# Altium PCB PCB.PcbDoc
Units mm, origin at the board's own origin, x right, y up, seen from the top; angles counter-clockwise.
Board outline 152.4 x 101.6 mm, 2 copper layers (Top Layer, Bottom Layer); 31 components, 28 nets, 112 pads, 13 vias.
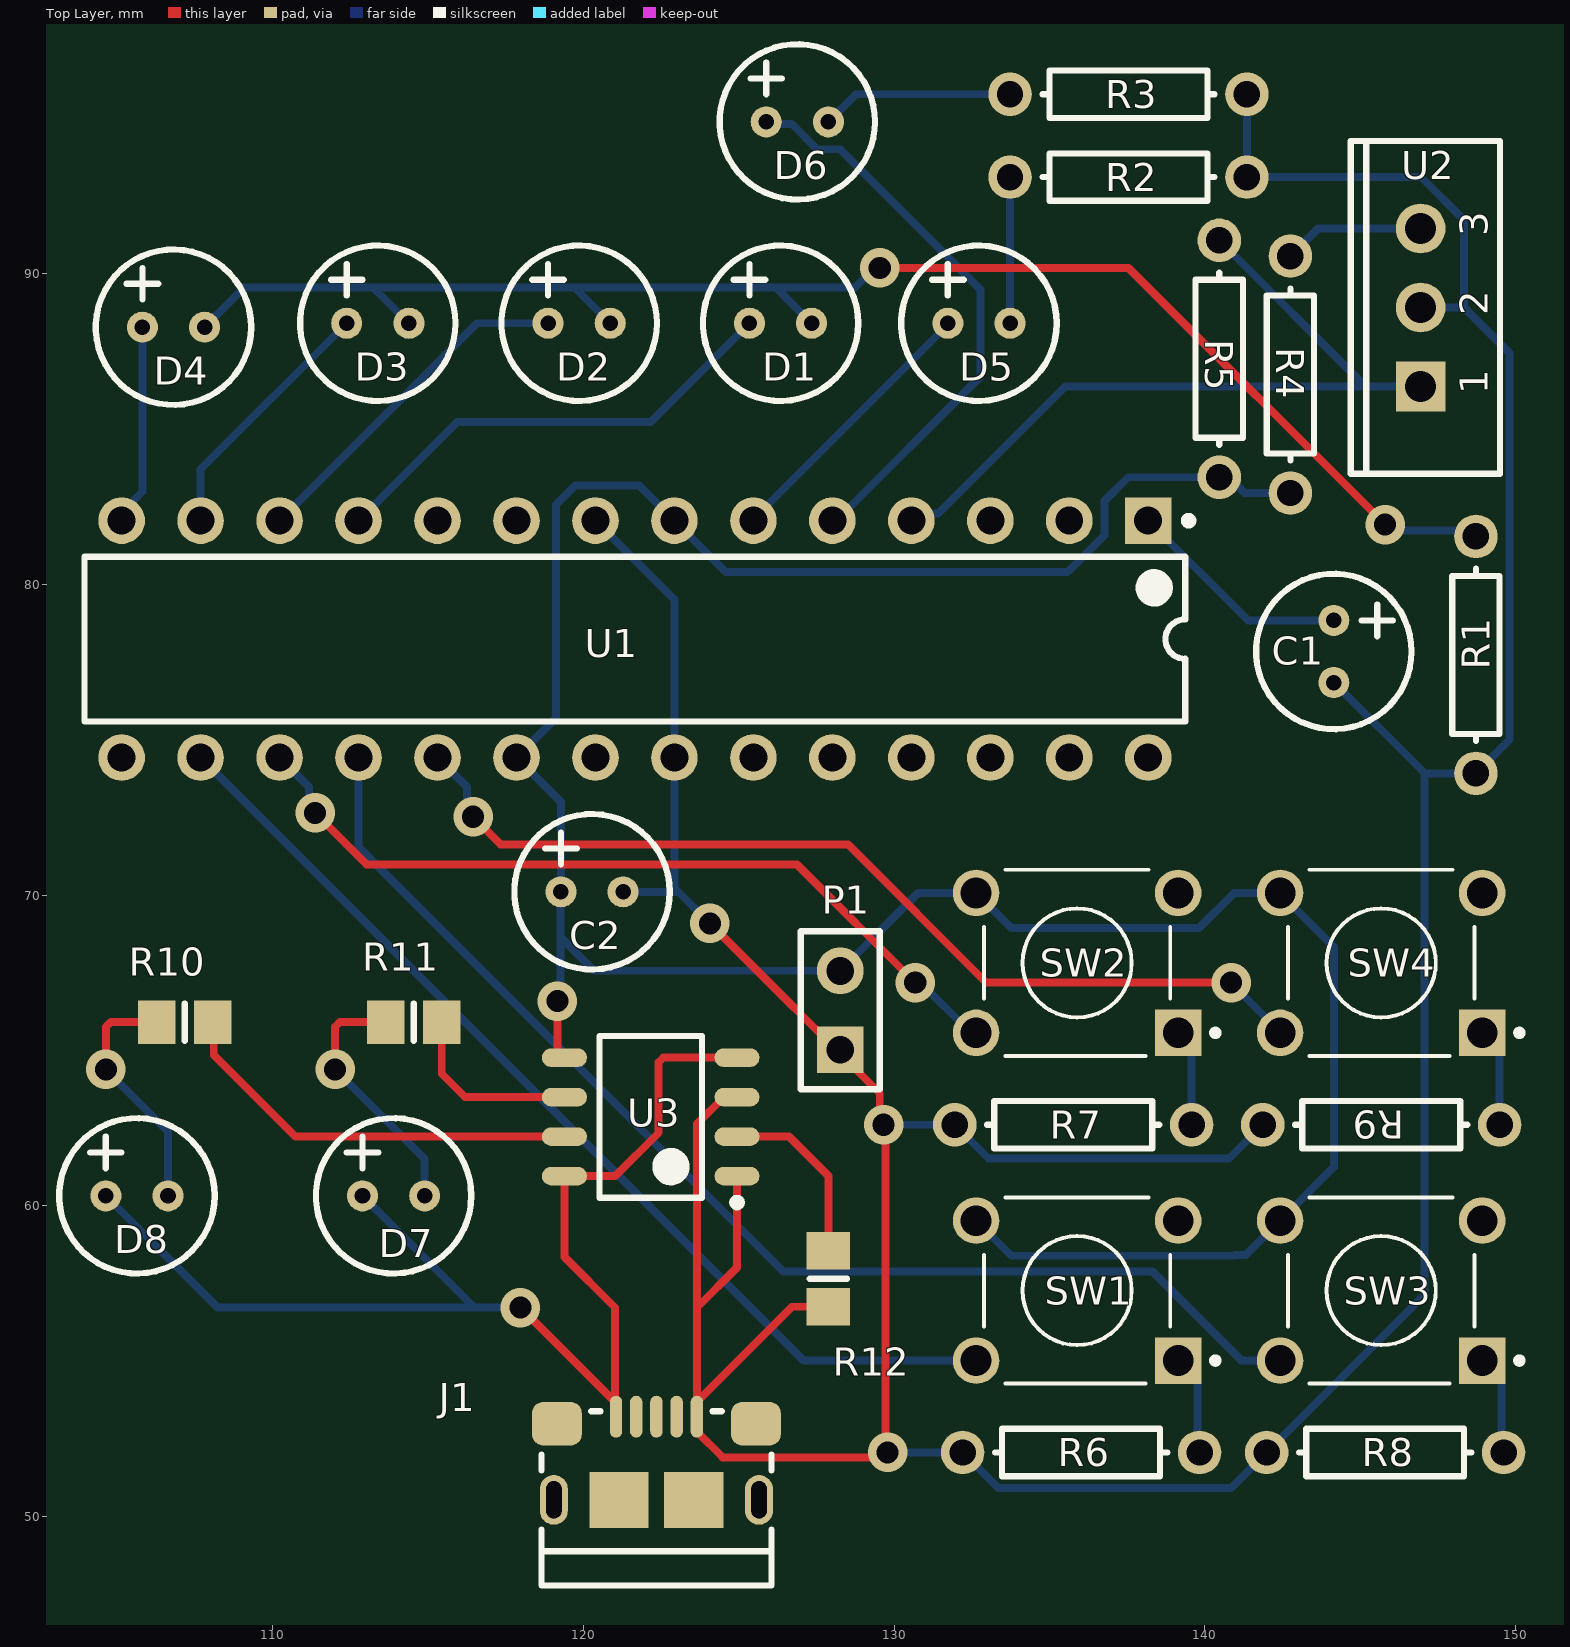
[diagram p0: Top Layer view]
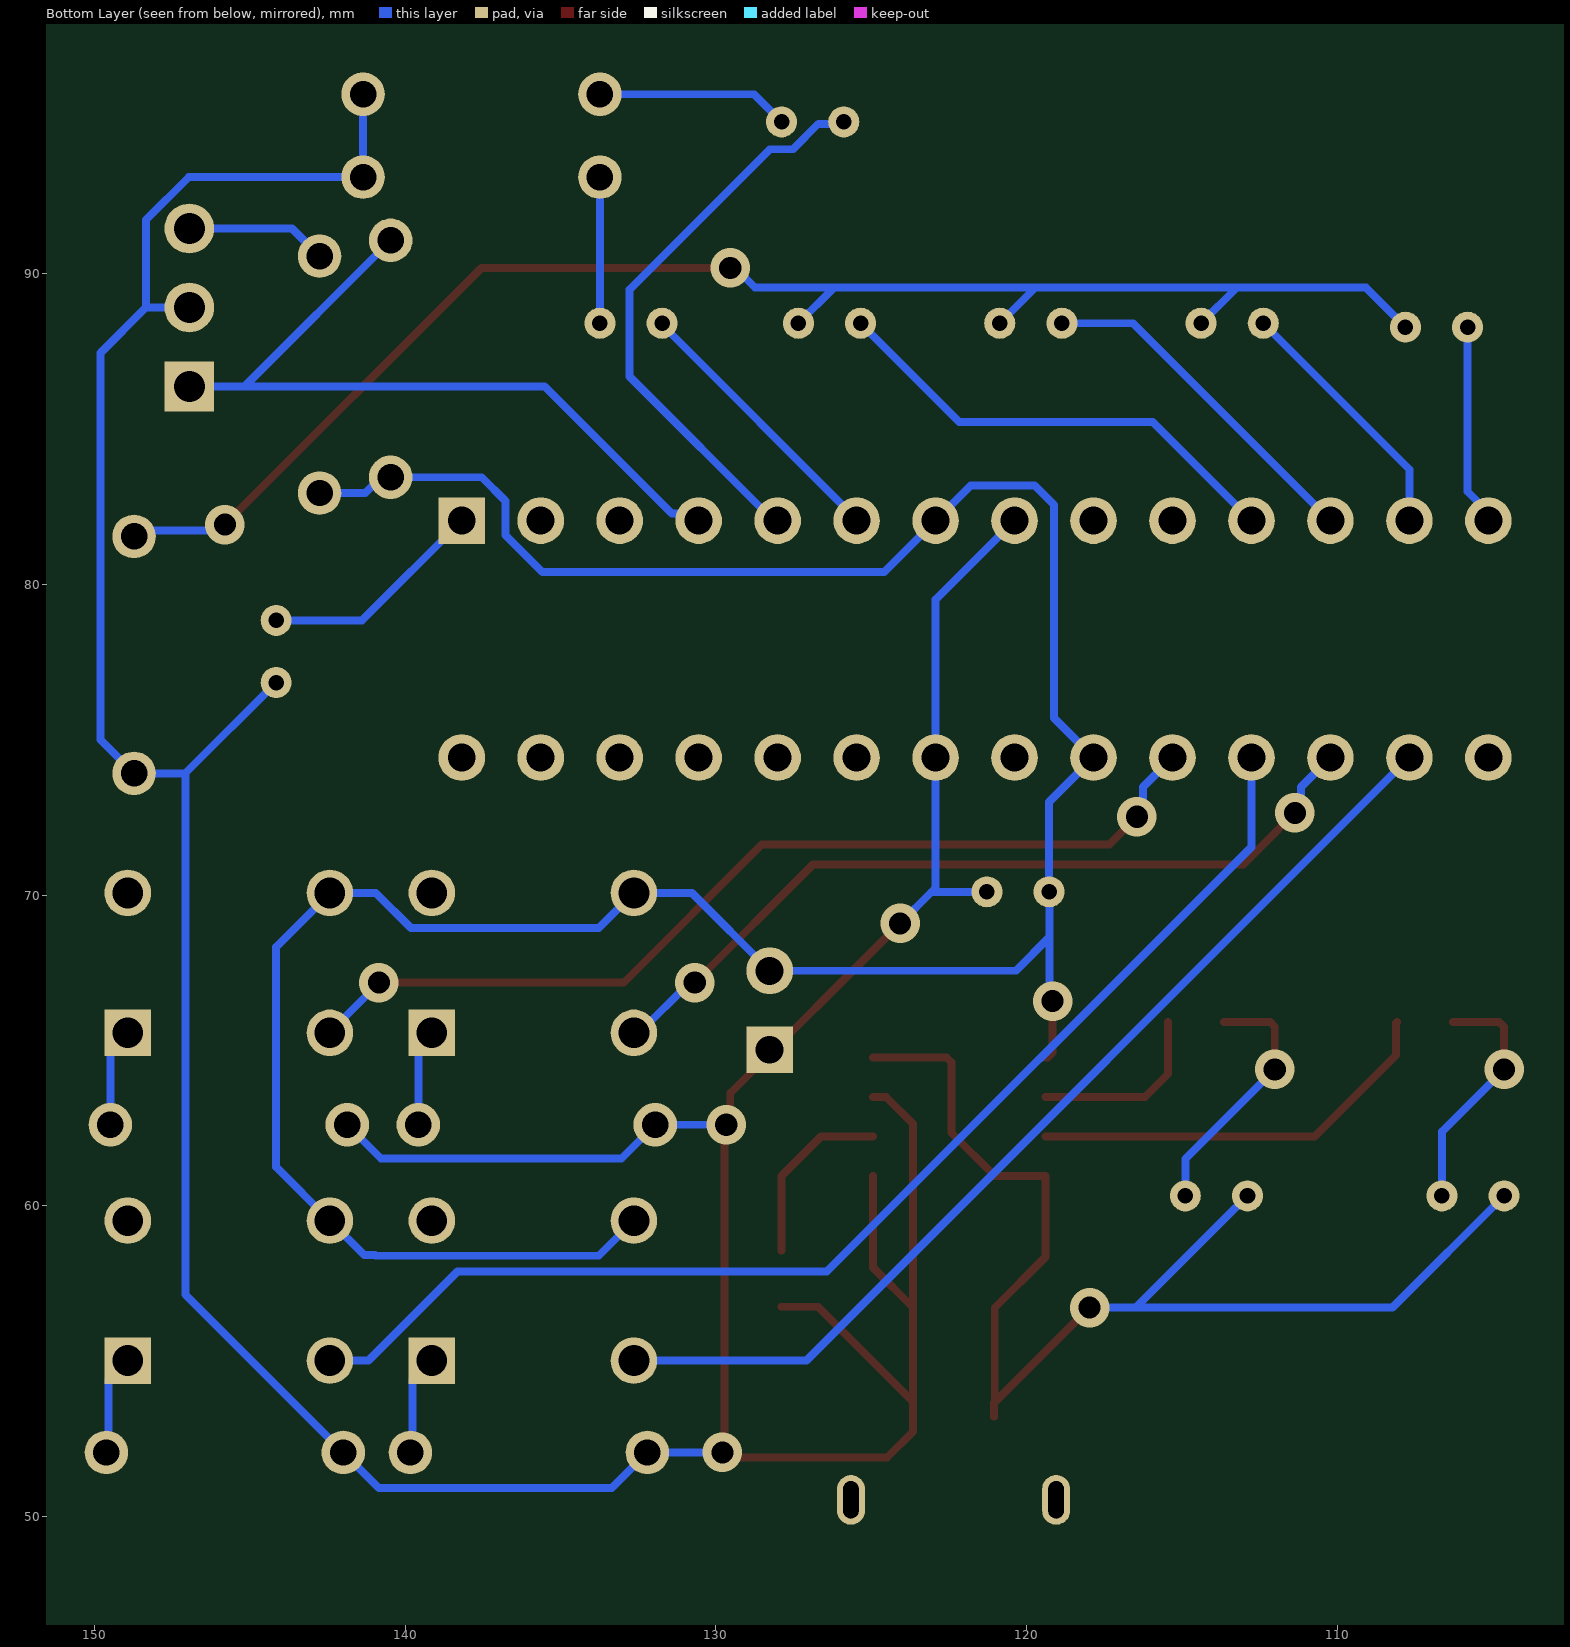
[diagram p1: Bottom Layer view, seen from below]

## Layer stack, top to bottom
Top Solder: solder mask 0.0102, Solder Resist, Dk 3.5
Top Layer: signal copper 0.0356
Dielectric 1: dielectric 0.32, FR-4, Dk 4.8
Bottom Layer: signal copper 0.0356
Bottom Solder: solder mask 0.0102, Solder Resist, Dk 3.5

## Board outline
25.4,25.4 177.8,25.4 177.8,127 25.4,127

## Design rules (kind name [scope] priority, off if disabled: settings)
BoardOutlineClearance [All] p1: gap=0.2 ignorepadtopadclearanceinfootprint=FALSE except(0.4: Arc-SplitBarrior Arc-SplitContinuation Track-SplitBarrior Track-SplitContinuation SMDPad-SplitBarrior SMDPad-SplitContinuation THPad-SplitBarrior THPad-SplitContinuation Via-SplitBarrior Via-SplitContinuation Fill-SplitBarrior Fill-SplitContinuation Poly-SplitBarrior Poly-SplitContinuation Region-SplitBarrior Region-SplitContinuation Text-SplitBarrior Text-SplitContinuation)
Clearance "Clearance Bottom Layer" [OnLayer('Bottom Layer')] p1: gap=0.203 ignorepadtopadclearanceinfootprint=TRUE except(0.254: Arc-Text Track-Text SMDPad-Text THPad-Text Via-Text Fill-Text Poly-Text Region-Text Text-Text)
Clearance "Clearance Top Layer" [OnLayer('Top Layer')] p2: gap=0.203 ignorepadtopadclearanceinfootprint=TRUE except(0.254: Arc-Text Track-Text SMDPad-Text THPad-Text Via-Text Fill-Text Poly-Text Region-Text Text-Text)
Clearance [All] p3: gap=0.2 ignorepadtopadclearanceinfootprint=FALSE except(0.089: Arc-Arc Arc-Track Arc-SMDPad Track-Track Track-SMDPad SMDPad-SMDPad; 0.127: Arc-Via Track-Via SMDPad-Via THPad-Via Via-Via; 0.254: Arc-Text Track-Text SMDPad-Text THPad-Text Via-Text Fill-Text Poly-Text Region-Text Text-Text)
HoleSize [All] p1: absolutevalues=TRUE maxlimit=6.3 minlimit=0.2 maxpercent=80.000 minpercent=20.000
MinimumAnnularRing [All] p1: minimumring=0.076
MinimumSolderMaskSliver [All] p1: minsoldermaskwidth=0.1
PolygonConnect PolygonConnect_1 [All] p1: thpad.connectstyle=Relief thpad.reliefconductorwidth=0.508 thpad.reliefentries=4 thpad.polygonreliefangle="90 Angle" thpad.airgapwidth=0.254 smdpad.connectstyle=Relief smdpad.reliefconductorwidth=0.508 smdpad.reliefentries=4 smdpad.polygonreliefangle="90 Angle" smdpad.airgapwidth=0.254 via.connectstyle=Direct via.reliefconductorwidth=0.508 via.reliefentries=4 via.polygonreliefangle="90 Angle" via.airgapwidth=0.254
RoutingCorners [All] p1: cornerstyle=Round minsetback=2.54 maxsetback=2.54
RoutingVias [All] p1: holewidth=0.5 width=1 viastyle="Through Hole" minholewidth=0.2 minwidth=0.45 maxholewidth=1 maxwidth=2
SilkToSilkClearance [All] p1: silktosilkclearance=0.1
SilkToSolderMaskClearance [IsPad] p1: minsilkscreentomaskgap=0.1 clearancetoexposedcopper=TRUE
SolderMaskExpansion [All] p1: expansion=0.102 istentingtop=FALSE
Width [All] p1: maxlimit=2.54 minlimit=0.089 preferedwidth=0.381
25 further rules are at their usual default settings.

## Components (designator, comment, footprint, x,y, rotation, side; value= is the part's Value field where it differs from the comment)
C1 "Cap Pol1" "5mm CAP" 144.145,78.835 r270 top value=10uF
C2 "Cap Pol1" "5mm CAP" 119.285,70.104 r0 top value=100uF
D1 "GREEN" "5mm CAP" 125.349,88.392 r0 top
D2 "GREEN" "5mm CAP" 118.872,88.392 r0 top
D3 "GREEN" "5mm CAP" 112.395,88.392 r0 top
D4 "GREEN" "5mm CAP" 105.823,88.265 r0 top
D5 "RED" "5mm CAP" 131.731,88.392 r0 top
D6 "IR" "5mm CAP" 125.889,94.869 r0 top
D7 "GREEN" "5mm CAP" 112.903,60.325 r0 top
D8 "RED" "5mm CAP" 104.648,60.325 r0 top
J1 "10118193-0001LF" "FCI USB 10118193-0001LF" 122.358,50.596 r180 top
P1 "Header 2" HDR1X2 128.27,65.024 r90 top
R1 "Res1" AXIAL-0.3 148.717,77.724 r90 top value=1K
R2 "Res1" AXIAL-0.3 137.541,93.091 r180 top value=1K
R3 "Res1" AXIAL-0.3 137.541,95.758 r180 top value=220R
R4 "Res1" AXIAL-0.3 142.748,86.741 r270 top value=100R
R5 "Res1" AXIAL-0.3 140.462,87.249 r270 top value=47k
R6 "Res1" AXIAL-0.3 136.017,52.07 r0 top value=22k
R7 "Res1" AXIAL-0.3 135.763,62.611 r0 top value=22k
R8 "Res1" AXIAL-0.3 145.796,52.07 r0 top value=22k
R9 "Res1" AXIAL-0.3 145.669,62.611 r0 top value=22k
R10 "Res1" 6-0805_N 107.188,65.913 r180 top value=1K
R11 "Res1" 6-0805_N 114.554,65.913 r180 top value=1k
R12 "Res1" 6-0805_N 127.889,57.658 r90 top value=2k
SW1 "430476085716" SW_1825910-6-4 135.89,57.277 r180 top
SW2 "430476085716" SW_1825910-6-4 135.89,67.818 r180 top
SW3 "430476085716" SW_1825910-6-4 145.669,57.277 r180 top
SW4 "430476085716" SW_1825910-6-4 145.669,67.818 r180 top
U1 "ATmega328P-PU" 28P3 121.666,78.232 r270 top
U2 "CHO 1838" TO-220-AB 146.939,88.9 r90 top
U3 "TP4056" "Universal SOP 8" 122.174,62.865 r180 top

## Footprints (in the part's own frame and the unit in brackets; to place one, negate y for a bottom-side part, rotate by r counter-clockwise, add the part's x,y. Pads: shape width x height; smd on the part's side, far side on the other; paste and mask are expansions set on the pad)
"5mm CAP" [mm]
  round 1 hole 0.5: 1(0,0) 2(2,0)
  silkscreen extent -1.5,-2.5 3.5,2.5
6-0805_N [mm] "Chip Resistor, Body 2.0x1.2mm, IPC Medium Density"
  rect 1.2x1.4 smd: 1(-0.9,0) 2(0.9,0)
  silkscreen extent 0,-0.6 0,0.6, body extent -1.07,-0.7 1.07,0.7, height 0.7
28P3 [mm] "28-Pin Plastic Dual In-Line Package (PDIP)"
  rect 1.5x1.5 hole 0.9: 1(-3.81,16.51)
  round 1.5 hole 0.9: 2(-3.81,13.97) 3(-3.81,11.43) 4(-3.81,8.89) 5(-3.81,6.35) 6(-3.81,3.81) 7(-3.81,1.27) 8(-3.81,-1.27) 9(-3.81,-3.81) 10(-3.81,-6.35) 11(-3.81,-8.89) 12(-3.81,-11.43) 13(-3.81,-13.97) 14(-3.81,-16.51) 15(3.81,-16.51) 16(3.81,-13.97) 17(3.81,-11.43) 18(3.81,-8.89) 19(3.81,-6.35) 20(3.81,-3.81) 21(3.81,-1.27) 22(3.81,1.27) 23(3.81,3.81) 24(3.81,6.35) 25(3.81,8.89) 26(3.81,11.43) 27(3.81,13.97) 28(3.81,16.51)
  silkscreen extent -3.93,-17.7 2.65,17.94, body extent -3.6,-17.65 3.6,17.65, height 4.58
AXIAL-0.3 [mm] "Axial Device, Thru-Hole; 2 Leads; 0.3 in Pin Spacing"
  round 1.4 hole 0.85: 1(-3.81,0) 2(3.81,0)
  silkscreen extent -2.77,-0.76 2.77,0.76
"FCI USB 10118193-0001LF" [mm] "USB 2.0 Type B Micro"
  oval 0.4x1.35 smd: 1(1.3,-2.625) 2(0.65,-2.625) 3(0,-2.625) 4(-0.65,-2.625) 5(-1.3,-2.625)
  oval 0.9x1.6 hole 0.5 slot 1.2 at 90 deg: S(-3.3,0.05) S(3.3,0.05)
  rrect50% 1.6x1.4 smd: S(-3.2,-2.4) S(3.2,-2.4)
  rect 1.9x1.8 smd: S(-1.2,0.05) S(1.2,0.05)
  silkscreen extent -3.7,-2.8 3.7,2.8, body extent -3.93,-2.9 3.93,2.76, height 2.78
HDR1X2 [mm] "Connector; Header; 2 Position"
  rect 1.5x1.5 hole 0.9: 1(0,0)
  round 1.5 hole 0.9: 2(2.54,0)
  silkscreen extent -1.27,-1.27 3.81,1.27
SW_1825910-6-4 [mm]
  rect 1.498x1.498 hole 0.99: 1(-3.25,2.25)
  round 1.498 hole 0.99: 2(3.25,2.25) 3(-3.25,-2.25) 4(3.25,-2.25)
  silkscreen extent -4.54,-3 3,3
TO-220-AB [mm] "TO, Thru-Hole, Vertical, Heatsink Mounted; 3 In-Line Leads; Pitch 2.54 mm"
  rect 1.6x1.6 hole 1: 1(-2.54,0)
  round 1.6 hole 1: 2(0,0) 3(2.54,0)
  silkscreen extent -5.35,-2.55 5.35,2.25
"Universal SOP 8" [mm]
  oval 1.45x0.6 smd: 1(-2.775,1.905) 2(-2.775,0.635) 3(-2.775,-0.635) 4(-2.775,-1.905) 5(2.775,-1.905) 6(2.775,-0.635) 7(2.775,0.635) 8(2.775,1.905)
  silkscreen extent -2.9,-2.6 1.65,2.88, body extent -3,-2.6 3,2.6, height 1.75

## Part data
C1 C2: "Polarized Capacitor (Radial)", LatestRevisionDate=17-Jul-2002, LatestRevisionNote="Re-released for DXP Platform.", PackageDescription="Polarized Capacitor (Radial); 2 Leads", PackageReference=RB7.6-15, Published=8-Jun-2000, Publisher="Altium Limited"
D1 D2 D3 D4 D5 D6 D7 D8: library part LED0, "Typical INFRARED GaAs LED", LatestRevisionDate=08-Jul-2005, LatestRevisionNote="Mech Layer 1 removed.", PackageDescription="LED; 2 Leads", PackageReference=LED-0, Published=8-Jun-2000, Publisher="Altium Limited"
J1: "CONN RCPT USB2.0 MICRO B SMD R/A", Current Rating (Amps)="1.8A per Contact", Manufacturer="Amphenol ICC (FCI)", Operating Temperature="-30°C ~ 80°C", Supplier Part Number 1=609-4616-2-ND, Voltage - Rated=100VAC, ComponentLink1Description=Datasheet, ComponentLink1URL=https://cdn.amphenol-icc.com/media/wysiwyg/files/documentation/datasheet/inputoutput/io_usb_micro.pdf, ComponentLink2Description="DigiKey Link", ComponentLink2URL=//digikey.com/product-detail/en/amphenol-icc-fci/10118193-0001LF/609-4616-2-ND/2785388, Connector Type="USB - micro B", Features="Solder Retention", Gender=Receptacle, LastUpdated="12/9/2019 8:51:28 PM", Lifecycle Status=0, Mating Cycles=10000, Minimum Order=1, Mounting Feature=Horizontal, Mounting Type="Surface Mount, Right Angle; Through Hole", Number of Contacts=5, Number of Ports=1, Packaging=TapeAndReel, Part Number=10118193-0001LF, Part Status=Active, Price=0.21, Series=-, Shielding=Shielded, Specifications="USB 2.0", Supplier 1=DigiKey, Termination=Solder
P1: "Header, 2-Pin", LatestRevisionDate=17-Jul-2002, LatestRevisionNote="Re-released for DXP Platform.", Publisher="Altium Limited"
R1 R2 R3 R4 R5 R6 R7 R8 R9 R10 R11 R12: "Resistor", LatestRevisionDate=17-Jul-2002, LatestRevisionNote="Re-released for DXP Platform.", PackageDescription="Axial Device, Thru-Hole; 2 Leads; 0.3 in Pin Spacing", PackageReference=AXIAL-0.3, Published=8-Jun-2000, Publisher="Altium Limited"
SW1 SW2 SW3 SW4: "WS-TATV THT Tact Switch 12X12 mm", ComponentLink1Description="Manufacturer URL", ComponentLink1URL=http://www.we-online.com, ComponentLink2Description=Datasheet, ComponentLink2URL=http://katalog.we-online.de/em/datasheet/430476085716.pdf, NoPins=04, PackageReference=430476085716, PartNumber=430476085716
U1: "8-bit AVR Microcontroller, 32KB Flash, 1KB EEPROM, 2KB SRAM, 28-pin PDIP, Industrial Grade (-40°C to 85°C)", ComponentLink1Description="Manufacturer URL", ComponentLink1URL=http://www.atmel.com/, ComponentLink2Description="ATmega48A/48PA/88A/88PA/168A/168PA/328/328P Datasheet", ComponentLink2URL=http://www.atmel.com/dyn/resources/prod_documents/8271.pdf, ComponentLink3Description="ATmega48A/48PA/88A/88PA/168A/168PA/328/328P Summary", ComponentLink3URL=http://www.atmel.com/dyn/resources/prod_documents/8271S.pdf, DatasheetVersion="revD, May-2011", PackageDescription="28-lead (0.300\"/7.62mm Wide) Plastic Dual Inline Package (PDIP)", PackageReference=28P3, PackageVersion="revB, Sep-2001"
U2: "IR Receiver"

## Via types
v1: diameter 1.27, hole 0.711, Top Layer to Bottom Layer, 13 vias

## Nets (pads, with @x,y where several pads share a name; then routed paths per layer and width w, separated by ;. In a path a pad name is that pad's centre, name@x,y a point inside that pad or via, vN(x,y) a via of type N, cw(c..) or ccw(c..) an arc to the next point about the centre after c; other vN are vias at no path point)
GND: C1.2 C2.2 J1.5 P1.1 R1.1 R2.1 R3.1 R6.1 R7.1 R8.1 R9.1 R12.1 U1.8 U1.22 U2.2 U3.1 U3.3 | length 150.4
  Top Layer w0.254: v1(124.079,69.088) 129.54,63.627 129.54,62.738 v1(129.667,62.611) 129.731,62.547 129.731,52.133 v1(129.794,52.07) 129.639,51.915 124.489,51.915 123.658,52.746 J1.5 J1.5@123.658,53.696 ; U3.1 124.949,58.02 123.658,56.729 ; U3.3 124.524,63.5 123.658,62.634 123.658,56.729 ; R12.1 126.72,56.758 J1.5@123.658,53.696 ; J1.5@123.658,53.696 123.658,56.729
  Bottom Layer w0.254: U1.8 122.936,79.502 U1.22 122.936,70.231 123.063,70.104 ; C2.2 123.063,70.104 ; v1(124.079,69.088) 123.063,70.104 ; v1(129.667,62.611) R7.1 133.034,61.53 140.778,61.53 R9.1 ; v1(129.794,52.07) R6.1 133.35,50.927 140.843,50.927 R8.1 147.066,57.15 147.066,73.914 ; R3.1 R2.1 146.958,93.091 148.336,91.713 148.336,88.9 ; C1.2 147.066,73.914 ; U2.2 148.336,88.9 ; 147.066,73.914 R1.1 149.798,74.995 149.798,87.438 148.336,88.9
NetC1_1: C1.1 U1.1 | length 7.3
  Bottom Layer w0.254: U1.1 141.383,78.835 C1.1
NetD1_1: D1.1 U1.11 | length 15.2
  Bottom Layer w0.254: U1.11 115.951,85.217 122.174,85.217 D1.1
NetD1_2: D1.2 D2.2 D3.2 D4.2 R1.2 | length 50.1
  Top Layer w0.254: v1(129.54,90.17) 137.541,90.17 v1(145.796,81.915)
  Bottom Layer w0.254: D4.2 109.093,89.535 113.252,89.535 ; D3.2 113.252,89.535 ; D2.2 119.729,89.535 ; D1.2 126.206,89.535 ; v1(129.54,90.17) 129.373,90.17 128.738,89.535 126.206,89.535 ; v1(145.796,81.915) 145.987,81.724 148.526,81.724 R1.2 ; 113.252,89.535 119.729,89.535 ; 119.729,89.535 126.206,89.535
NetD2_1: D2.1 U1.12 | length 11.3
  Bottom Layer w0.254: U1.12 116.586,88.392 D2.1
NetD3_1: D3.1 U1.13 | length 8.3
  Bottom Layer w0.254: U1.13 107.696,83.693 D3.1
NetD4_1: D4.1 U1.14 | length 6.5
  Bottom Layer w0.254: U1.14 105.156,82.307 105.823,82.974 D4.1
NetD5_1: D5.1 U1.6 | length 8.9
  Bottom Layer w0.254: U1.6 125.476,82.09 131.731,88.345 D5.1
NetD5_2: D5.2 R2.2 | length 4.7
  Bottom Layer w0.254: D5.2 R2.2
NetD6_1: D6.1 U1.5 | length 18.6
  Bottom Layer w0.254: D6.1 125.952,94.805 126.707,94.805 127.524,93.988 128.262,93.988 132.779,89.471 132.779,86.677 128.143,82.042 U1.5
NetD6_2: D6.2 R3.2 | length 6.2
  Bottom Layer w0.254: D6.2 128.778,95.758 R3.2
NetD7_1: D7.1 D8.1 J1.1 U3.4 U3.8 | length 41.1
  Top Layer w0.254: v1(117.983,56.731) 120.991,53.724 121.058,53.656 J1.1 ; J1.1@121.031,53.724 121.031,56.725 119.399,58.357 U3.8 121.031,60.96 122.428,62.357 122.428,64.621 122.577,64.77 U3.4
  Bottom Layer w0.254: D8.1 108.242,56.731 116.497,56.731 ; D7.1 116.497,56.731 ; v1(117.983,56.731) 116.497,56.731
NetD7_2: D7.2 R11.2 | length 8.5
  Top Layer w0.254: v1(112.025,64.389) 112.025,65.764 112.174,65.913 R11.2
  Bottom Layer w0.254: v1(112.025,64.389) 114.903,61.511 D7.2 114.903,60.23 D7.2@114.935,60.198
NetD8_2: D8.2 R10.2 | length 8
  Top Layer w0.254: v1(104.648,64.389) 104.648,65.753 104.808,65.913 R10.2
  Bottom Layer w0.254: v1(104.648,64.389) 106.648,62.389 D8.2
NetR4_1: R4.1 U2.3 | length 4.6
  Bottom Layer w0.254: R4.1 143.637,91.44 U2.3
NetR5_1: R5.1 U1.4 U2.1 | length 24.8
  Bottom Layer w0.254: U1.4 130.784,82.27 131.419,82.27 135.509,86.36 145.161,86.36 ; R5.1 145.161,86.36 ; U2.1 145.161,86.36
NetR6_2: R6.2 SW1.1 | length 3.2
  Bottom Layer w0.254: SW1.1 139.762,54.405 139.762,52.135 R6.2
NetR7_2: R7.2 SW2.1 | length 3.1
  Bottom Layer w0.254: SW2.1 139.573,65.135 R7.2
NetR8_2: R8.2 SW3.1 | length 3.2
  Bottom Layer w0.254: SW3.1 149.541,54.405 149.541,52.135 R8.2
NetR9_2: R9.2 SW4.1 | length 3.2
  Bottom Layer w0.254: SW4.1 149.479,65.008 R9.2
NetR10_1: R10.1 U3.7 | length 13.4
  Top Layer w0.254: R10.1 108.12,65.881 108.12,64.854 110.744,62.23 U3.7
NetR11_1: R11.1 U3.6 | length 5.9
  Top Layer w0.254: R11.1 115.454,64.251 116.205,63.5 U3.6
NetR12_2: R12.2 U3.2 | length 5.9
  Top Layer w0.254: U3.2 126.619,62.23 127.889,60.96 R12.2
NetSW1_2: SW1.2 U1.16 | length 33
  Bottom Layer w0.254: U1.16 127.091,55.027 SW1.2
NetSW2_2: SW2.2 U1.17 | length 26.4
  Top Layer w0.254: v1(111.379,72.644) 112.395,71.628 113.038,70.985 126.881,70.985 v1(130.683,67.183)
  Bottom Layer w0.254: U1.17 111.185,73.473 111.185,72.838 v1(111.379,72.644) ; v1(130.683,67.183) 130.854,67.183 132.469,65.568 SW2.2
NetSW3_2: SW3.2 U1.18 | length 39.4
  Bottom Layer w0.254: U1.18 112.776,71.548 126.435,57.889 138.315,57.889 141.177,55.027 SW3.2
NetSW4_2: SW4.2 U1.19 | length 31.2
  Top Layer w0.254: v1(116.459,72.517) 117.348,71.628 128.524,71.628 132.969,67.183 v1(140.843,67.183)
  Bottom Layer w0.254: U1.19 116.265,73.473 116.265,72.711 v1(116.459,72.517) ; v1(140.843,67.183) 140.843,67.163 142.419,65.587 SW4.2
VCC: C2.1 P1.2 R4.2 R5.2 SW1.4 SW2.4 SW3.4 SW4.4 U1.7 U1.20 U3.5 | length 94.5
  Top Layer w0.254: v1(119.17,66.592) 119.17,64.93 119.329,64.77 U3.5
  Bottom Layer w0.254: v1(119.17,66.592) 119.269,66.691 119.269,68.647 ; SW1.4 133.77,58.397 140.947,58.397 140.97,58.42 141.312,58.42 SW3.4 144.145,61.253 144.145,68.326 142.419,70.052 SW4.4 140.942,70.068 139.812,68.938 133.77,68.938 SW2.4 130.774,70.068 P1.2 120.352,67.564 119.269,68.647 ; R4.2 141.28,82.931 140.772,83.439 R5.2 137.534,83.439 136.767,82.672 136.767,81.574 135.584,80.391 124.587,80.391 U1.7 121.805,83.173 119.749,83.173 119.126,82.55 119.126,75.692 U1.20 119.285,72.993 C2.1 119.269,70.088 119.269,68.647
pads on no net: J1.2 J1.3 J1.4 J1.S SW1.3 SW2.3 SW3.3 SW4.3 U1.2 U1.3 U1.9 U1.10 U1.15 U1.21 U1.23 U1.24 U1.25 U1.26 U1.27 U1.28

## Text inside footprints (layer, text, board x,y; h text height)
U2: Top Overlay "1" at 149.098,86.106 h0.9 r90; Top Overlay "2" at 149.098,88.646 h0.9 r90; Top Overlay "3" at 149.098,91.186 h0.9 r90